# EAGLE board OOBD - BTM182 - V4 - EuroPCB (EAGLE 5.11), part 1 of 3
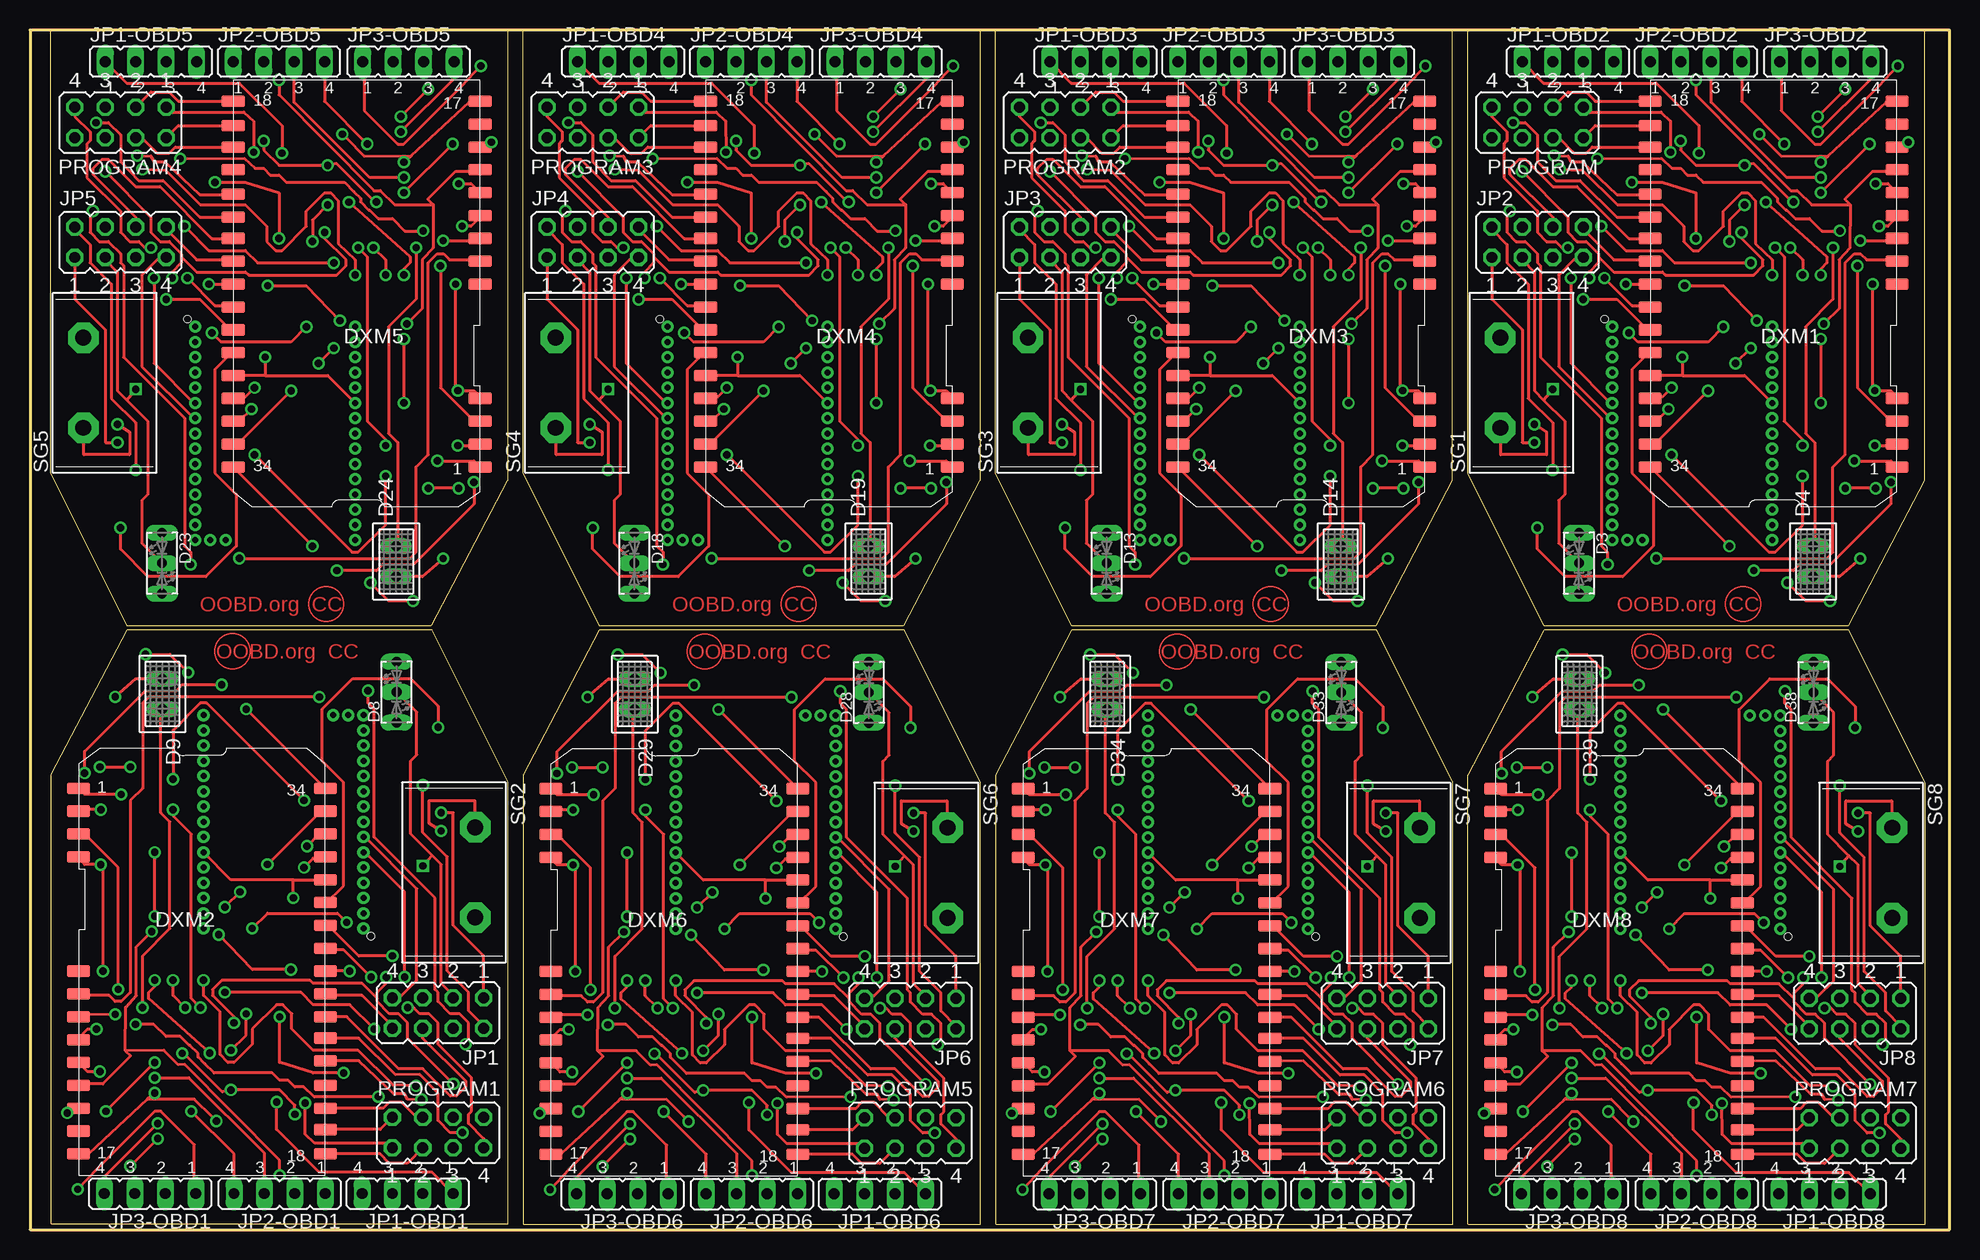
[diagram p0: board, top side]
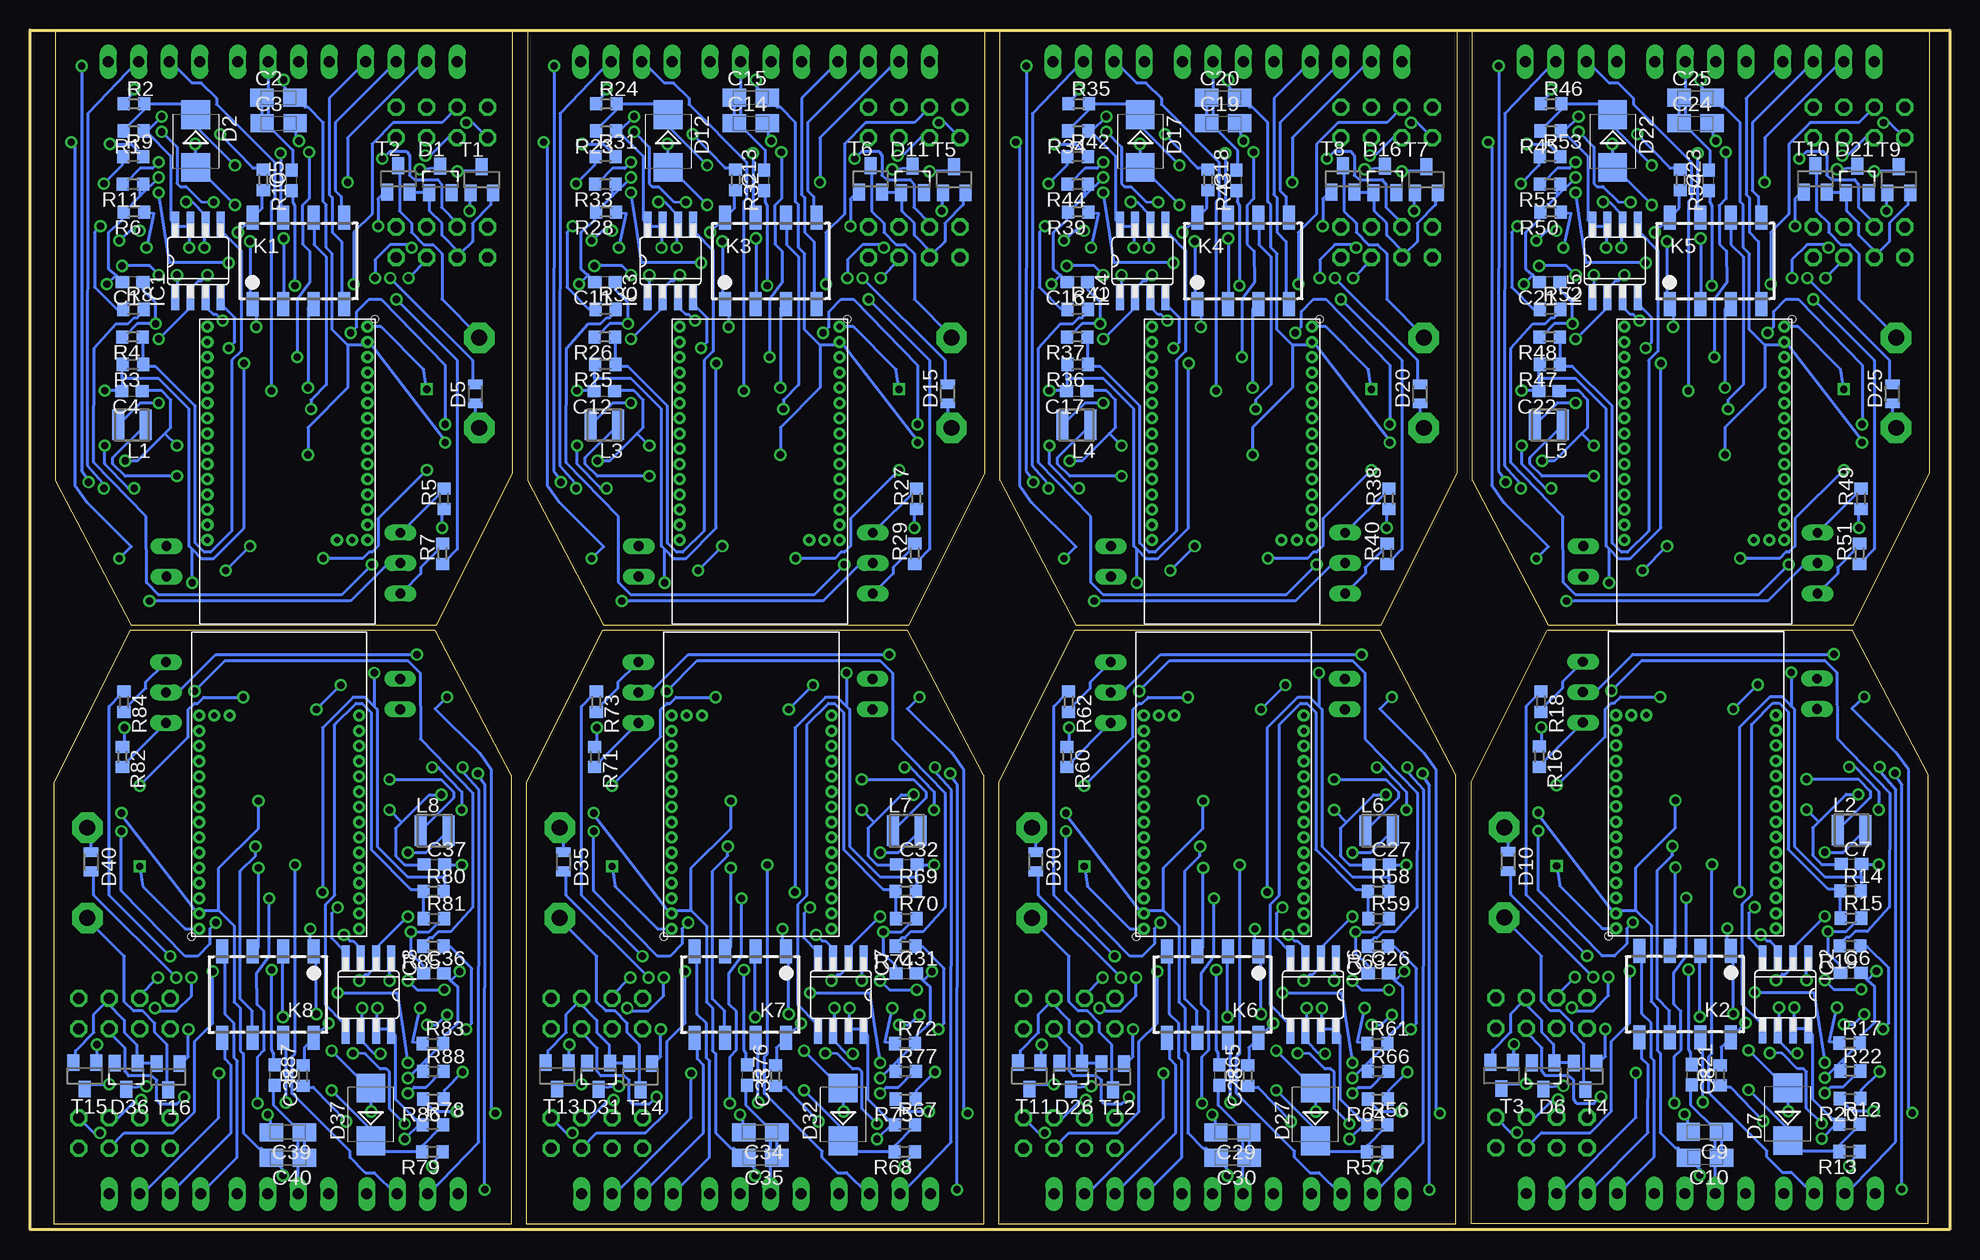
[diagram p1: board, bottom side, seen from below]

Size 160 x 100 mm. Coordinates in mm from the lower left corner, seen from the top.
Outline: 157.9,99.89 119.81,99.89 119.81,63.05 126.16,50.36
Outline: 157.91,99.89 157.91,62.43
Outline: 157.9,62.43 151.56,50.36 126.17,50.36
Outline: 1.77,0.46 39.86,0.46 39.86,37.3 33.51,49.99
Outline: 1.76,0.47 1.76,37.92
Outline: 1.77,37.92 8.11,49.99 33.5,49.99
Outline: 118.53,99.89 80.44,99.89 80.44,63.05 86.79,50.36
Outline: 118.54,99.89 118.54,62.43
Outline: 118.53,62.43 112.19,50.36 86.8,50.36
Outline: 79.16,99.89 41.07,99.89 41.07,63.05 47.42,50.36
Outline: 79.17,99.89 79.17,62.43
Outline: 79.16,62.43 72.82,50.36 47.43,50.36
Outline: 39.79,99.89 1.7,99.89 1.7,63.05 8.05,50.36
Outline: 39.8,99.89 39.8,62.43
Outline: 39.79,62.43 33.45,50.36 8.06,50.36
Outline: 41.14,0.43 79.23,0.43 79.23,37.27 72.88,49.96
Outline: 41.13,0.44 41.13,37.89
Outline: 41.14,37.89 47.48,49.96 72.87,49.96
Outline: 80.51,0.43 118.6,0.43 118.6,37.27 112.25,49.96
Outline: 80.5,0.44 80.5,37.89
Outline: 80.51,37.89 86.85,49.96 112.24,49.96
Outline: 119.88,0.43 157.97,0.43 157.97,37.27 151.62,49.96
Outline: 119.87,0.44 119.87,37.89
Outline: 119.88,37.89 126.22,49.96 151.61,49.96
Outline: 0,100 0,0 160,0 160,100 0,100
Copper layers (1*16): Top 0.035mm / dielectric 1.5mm / Bottom 0.035mm
Design rules "default *": minimum track width 10mil, minimum drill 24mil, track to track 8mil, track to pad 8mil, pad to pad 8mil, via to via 8mil, smd to smd 8mil, copper to edge 40mil, drill to drill 8mil, minimum pad ring 10mil, minimum via ring 8mil, stop-mask expansion 4mil, vias tented up to drill 0mil, thermal gap 10mil
tRestrict: area 132,50.6 to 144.3,53.9; area 15.3,46.4 to 27.7,49.7; area 92.6,50.6 to 105,53.9; area 53.3,50.6 to 65.6,53.9; area 13.9,50.6 to 26.2,53.9; area 54.7,46.4 to 67,49.7; area 94.1,46.4 to 106.4,49.7; area 133.5,46.4 to 145.8,49.7

## Footprints (pad centres in the part's own frame; a part is rotated, then mirrored left to right if it is on the bottom)
BTM182 = drill 0.5 pad 0.813 round: P$1 6.985,-13.97; P$2 8.255,-13.97; P$3 9.525,-13.97; P$4 10.795,-13.97; P$5 12.065,-13.97; P$6 13.335,-13.97; P$7 14.605,-13.97; P$8 15.875,-13.97; P$9 17.145,-13.97; P$10 18.415,-13.97; P$11 19.685,-13.97; P$12 20.955,-13.97; P$13 22.225,-13.97; P$14 23.495,-13.97; P$15 24.765,-13.97; P$16 24.765,-0.635; P$17 23.495,-0.635; P$18 22.225,-0.635; P$19 20.955,-0.635; P$20 19.685,-0.635; P$21 18.415,-0.635; P$22 17.145,-0.635; P$23 15.875,-0.635; P$24 14.605,-0.635; P$25 13.335,-0.635; P$26 12.065,-0.635; P$27 10.795,-0.635; P$28 9.525,-0.635; P$29 8.255,-0.635; P$30 6.985,-0.635; P$31 6.985,-12.7; P$32 6.985,-11.43 | hole 0.6: 25.4,-14.605
C0603 = smd 1.1 x 1: 1 -0.85,0; 2 0.85,0
A/3216-18R = smd 1.95 x 1.5: + 1.375,0; - -1.375,0
SOT23 = smd 1 x 1.4: 1 -0.95,-1.1; 2 0.95,-1.1; 3 0,1.1
SMB = smd 2.4 x 2.4: A 2.2,0; C -2.2,0
DUOLED2X5 = drill 0.813 long: AG -2.54,0; AR 2.54,0; K 0,0
U57X32 = drill 0.813 long: A -1.27,0; K 1.27,0
MICROMELF-R = smd 0.8 x 1.2: A 0.8,0; C -0.8,0
DMX1-MINI = smd 1.93 x 0.965: 1 0,32.258; 2 0,30.353; 3 0,28.448; 4 0,26.543; 9 0,17.018; 10 0,15.113; 11 0,13.208; 12 0,11.303; 13 0,9.398; 14 0,7.493; 15 0,5.588; 16 0,3.683; 17 0,1.778; 18 20.574,1.778; 19 20.574,3.81; 20 20.574,5.588; 21 20.574,7.493; 22 20.574,9.525; 23 20.574,11.43; 24 20.574,13.208; 25 20.574,15.113; 26 20.574,17.018; 27 20.574,18.923; 28 20.574,20.828; 29 20.574,22.733; 30 20.574,24.638; 31 20.574,26.543; 32 20.574,28.448; 33 20.574,30.353; 34 20.574,32.258
SO8 = smd 0.66 x 2.032: 1 -1.905,-3.073; 2 -0.635,-3.073; 3 0.635,-3.073; 4 1.905,-3.073; 5 1.905,3.073; 6 0.635,3.073; 7 -0.635,3.073; 8 -1.905,3.073
JP4Q = drill 0.914 octagon: 1 -3.81,-1.27; 2 -3.81,1.27; 3 -1.27,-1.27; 4 -1.27,1.27; 5 1.27,-1.27; 6 1.27,1.27; 7 3.81,-1.27; 8 3.81,1.27
JP4 = drill 0.914 long: 1 -3.81,0; 2 -1.27,0; 3 1.27,0; 4 3.81,0
G6K-2F = smd 1 x 2: 1 -3.81,-3.6; 2 -1.27,-3.6; 3 1.27,-3.6; 4 3.81,-3.6; 5 3.81,3.6; 6 1.27,3.6; 7 -1.27,3.6; 8 -3.81,3.6
SM-NE29 = smd 1 x 2.54: 1 -1.15,0; 2 1.15,0
R0603 = smd 1 x 1.1: 1 -0.85,0; 2 0.85,0
B/C11S = drill 1.321 pad 2.54 octagon: 1 -3.759,0; 2 3.759,0

## Placement (x,y rotation side)
BTM1  BT  [BTM182]  13.82,49.86 270 bottom
BTM2  BT  [BTM182]  106.47,50.49 90 bottom
BTM3  BT  [BTM182]  67.11,50.49 90 bottom
BTM4  BT  [BTM182]  27.73,50.49 90 bottom
BTM5  BT  [BTM182]  53.2,49.83 270 bottom
BTM6  BT  [BTM182]  92.56,49.83 270 bottom
BTM7  BT  [BTM182]  131.94,49.83 270 bottom
BTM182  BT  [BTM182]  145.84,50.49 90 bottom
C1  1µF  [C0603]  151.44,78.98 180 bottom
C2  220µF/6V  [A/3216-18R]  139.29,94.36 0 bottom
C3  47µF/35V  [A/3216-18R]  139.27,92.22 0 bottom
C4  100nF  [C0603]  151.49,69.89 180 bottom
C5  470pF  [C0603]  138.19,87.45 90 bottom
C6  1µF  [C0603]  8.23,21.38 0 bottom
C7  100nF  [C0603]  8.18,30.47 0 bottom
C8  470pF  [C0603]  21.48,12.9 270 bottom
C9  47µF/35V  [A/3216-18R]  20.4,8.14 180 bottom
C10  220µF/6V  [A/3216-18R]  20.38,6 180 bottom
C11  1µF  [C0603]  112.07,78.98 180 bottom
C12  100nF  [C0603]  112.12,69.89 180 bottom
C13  470pF  [C0603]  98.82,87.45 90 bottom
C14  47µF/35V  [A/3216-18R]  99.9,92.22 0 bottom
C15  220µF/6V  [A/3216-18R]  99.92,94.36 0 bottom
C16  1µF  [C0603]  72.7,78.98 180 bottom
C17  100nF  [C0603]  72.75,69.89 180 bottom
C18  470pF  [C0603]  59.45,87.45 90 bottom
C19  47µF/35V  [A/3216-18R]  60.53,92.22 0 bottom
C20  220µF/6V  [A/3216-18R]  60.55,94.36 0 bottom
C21  1µF  [C0603]  33.33,78.98 180 bottom
C22  100nF  [C0603]  33.38,69.89 180 bottom
C23  470pF  [C0603]  20.08,87.45 90 bottom
C24  47µF/35V  [A/3216-18R]  21.16,92.22 0 bottom
C25  220µF/6V  [A/3216-18R]  21.18,94.36 0 bottom
C26  1µF  [C0603]  47.6,21.35 0 bottom
C27  100nF  [C0603]  47.55,30.44 0 bottom
C28  470pF  [C0603]  60.85,12.87 270 bottom
C29  47µF/35V  [A/3216-18R]  59.77,8.11 180 bottom
C30  220µF/6V  [A/3216-18R]  59.75,5.97 180 bottom
C31  1µF  [C0603]  86.97,21.35 0 bottom
C32  100nF  [C0603]  86.92,30.44 0 bottom
C33  470pF  [C0603]  100.22,12.87 270 bottom
C34  47µF/35V  [A/3216-18R]  99.14,8.11 180 bottom
C35  220µF/6V  [A/3216-18R]  99.12,5.97 180 bottom
C36  1µF  [C0603]  126.34,21.35 0 bottom
C37  100nF  [C0603]  126.29,30.44 0 bottom
C38  470pF  [C0603]  139.59,12.87 270 bottom
C39  47µF/35V  [A/3216-18R]  138.51,8.11 180 bottom
C40  220µF/6V  [A/3216-18R]  138.49,5.97 180 bottom
D1  BAS40  [SOT23]  125.8,87.55 0 bottom
D2  B140  [SMB]  146.19,90.74 270 bottom
D3  HS / MS-CAN  [DUOLED2X5]  129.12,55.55 270 top
D4  U57X32  [U57X32]  148.63,55.7 90 top
D5  1N4148DO35-7  [MICROMELF-R]  122.86,69.67 90 bottom
D6  BAS40  [SOT23]  33.87,12.81 180 bottom
D7  B140  [SMB]  13.48,9.62 90 bottom
D8  HS / MS-CAN  [DUOLED2X5]  30.55,44.8 90 top
D9  U57X32  [U57X32]  11.04,44.66 270 top
D10  1N4148DO35-7  [MICROMELF-R]  36.81,30.69 270 bottom
D11  BAS40  [SOT23]  86.43,87.55 0 bottom
D12  B140  [SMB]  106.82,90.74 270 bottom
D13  HS / MS-CAN  [DUOLED2X5]  89.75,55.55 270 top
D14  U57X32  [U57X32]  109.26,55.7 90 top
D15  1N4148DO35-7  [MICROMELF-R]  83.49,69.67 90 bottom
D16  BAS40  [SOT23]  47.06,87.55 0 bottom
D17  B140  [SMB]  67.45,90.74 270 bottom
D18  HS / MS-CAN  [DUOLED2X5]  50.38,55.55 270 top
D19  U57X32  [U57X32]  69.89,55.7 90 top
D20  1N4148DO35-7  [MICROMELF-R]  44.12,69.67 90 bottom
D21  BAS40  [SOT23]  7.69,87.55 0 bottom
D22  B140  [SMB]  28.08,90.74 270 bottom
D23  HS / MS-CAN  [DUOLED2X5]  11.01,55.55 270 top
D24  U57X32  [U57X32]  30.52,55.7 90 top
D25  1N4148DO35-7  [MICROMELF-R]  4.75,69.67 90 bottom
D26  BAS40  [SOT23]  73.24,12.78 180 bottom
D27  B140  [SMB]  52.85,9.59 90 bottom
D28  HS / MS-CAN  [DUOLED2X5]  69.92,44.77 90 top
D29  U57X32  [U57X32]  50.41,44.63 270 top
D30  1N4148DO35-7  [MICROMELF-R]  76.18,30.66 270 bottom
D31  BAS40  [SOT23]  112.61,12.78 180 bottom
D32  B140  [SMB]  92.22,9.59 90 bottom
D33  HS / MS-CAN  [DUOLED2X5]  109.29,44.77 90 top
D34  U57X32  [U57X32]  89.78,44.63 270 top
D35  1N4148DO35-7  [MICROMELF-R]  115.55,30.66 270 bottom
D36  BAS40  [SOT23]  151.98,12.78 180 bottom
D37  B140  [SMB]  131.59,9.59 90 bottom
D38  HS / MS-CAN  [DUOLED2X5]  148.66,44.77 90 top
D39  U57X32  [U57X32]  129.15,44.63 270 top
D40  1N4148DO35-7  [MICROMELF-R]  154.92,30.66 270 bottom
DXM1  Controller  [DMX1-MINI]  155.62,95.83 180 top
DXM2  Controller  [DMX1-MINI]  4.05,4.52 0 top
DXM3  Controller  [DMX1-MINI]  116.25,95.83 180 top
DXM4  Controller  [DMX1-MINI]  76.88,95.83 180 top
DXM5  Controller  [DMX1-MINI]  37.51,95.83 180 top
DXM6  Controller  [DMX1-MINI]  43.42,4.49 0 top
DXM7  Controller  [DMX1-MINI]  82.79,4.49 0 top
DXM8  Controller  [DMX1-MINI]  122.16,4.49 0 top
IC1  MC34063-SO  [SO8]  145.99,80.75 0 bottom
IC2  MC34063-SO  [SO8]  13.68,19.61 180 bottom
IC3  MC34063-SO  [SO8]  106.62,80.75 0 bottom
IC4  MC34063-SO  [SO8]  67.25,80.75 0 bottom
IC5  MC34063-SO  [SO8]  27.88,80.75 0 bottom
IC6  MC34063-SO  [SO8]  53.05,19.58 180 bottom
IC7  MC34063-SO  [SO8]  92.42,19.58 180 bottom
IC8  MC34063-SO  [SO8]  131.79,19.58 180 bottom
JP1  _  [JP4Q]  34.02,18.04 180 top
JP1-OBD1  1  [JP4]  31.48,3 180 top
JP1-OBD2  1  [JP4]  128.19,97.36 0 top
JP1-OBD3  1  [JP4]  88.82,97.36 0 top
JP1-OBD4  1  [JP4]  49.45,97.36 0 top
JP1-OBD5  1  [JP4]  10.08,97.36 0 top
JP1-OBD6  1  [JP4]  70.85,2.97 180 top
JP1-OBD7  1  [JP4]  110.22,2.97 180 top
JP1-OBD8  1  [JP4]  149.59,2.97 180 top
JP2  _  [JP4Q]  125.65,82.31 0 top
JP2-OBD1  2  [JP4]  20.81,3 180 top
JP2-OBD2  2  [JP4]  138.86,97.36 0 top
JP2-OBD3  2  [JP4]  99.49,97.36 0 top
JP2-OBD4  2  [JP4]  60.12,97.36 0 top
JP2-OBD5  2  [JP4]  20.75,97.36 0 top
JP2-OBD6  2  [JP4]  60.18,2.97 180 top
JP2-OBD7  2  [JP4]  99.55,2.97 180 top
JP2-OBD8  2  [JP4]  138.92,2.97 180 top
JP3  _  [JP4Q]  86.28,82.31 0 top
JP3-OBD1  3  [JP4]  10.02,3 180 top
JP3-OBD2  3  [JP4]  149.66,97.36 0 top
JP3-OBD3  3  [JP4]  110.28,97.36 0 top
JP3-OBD4  3  [JP4]  70.92,97.36 0 top
JP3-OBD5  3  [JP4]  31.55,97.36 0 top
JP3-OBD6  3  [JP4]  49.38,2.97 180 top
JP3-OBD7  3  [JP4]  88.75,2.97 180 top
JP3-OBD8  3  [JP4]  128.12,2.97 180 top
JP4  _  [JP4Q]  46.91,82.31 0 top
JP5  _  [JP4Q]  7.54,82.31 0 top
JP6  _  [JP4Q]  73.39,18.01 180 top
JP7  _  [JP4Q]  112.76,18.01 180 top
JP8  _  [JP4Q]  152.13,18.01 180 top
K1  G6K-2F  [G6K-2F]  137.62,80.74 0 bottom
K2  G6K-2F  [G6K-2F]  22.05,19.61 180 bottom
K3  G6K-2F  [G6K-2F]  98.25,80.74 0 bottom
K4  G6K-2F  [G6K-2F]  58.88,80.74 0 bottom
K5  G6K-2F  [G6K-2F]  19.51,80.74 0 bottom
K6  G6K-2F  [G6K-2F]  61.42,19.58 180 bottom
K7  G6K-2F  [G6K-2F]  100.79,19.58 180 bottom
K8  G6K-2F  [G6K-2F]  140.16,19.58 180 bottom
L1  220µH  [SM-NE29]  151.51,67.07 180 bottom
L2  220µH  [SM-NE29]  8.16,33.29 0 bottom
L3  220µH  [SM-NE29]  112.14,67.07 180 bottom
L4  220µH  [SM-NE29]  72.77,67.07 180 bottom
L5  220µH  [SM-NE29]  33.4,67.07 180 bottom
L6  220µH  [SM-NE29]  47.53,33.26 0 bottom
L7  220µH  [SM-NE29]  86.9,33.26 0 bottom
L8  220µH  [SM-NE29]  126.27,33.26 0 bottom
PROGRAM  [JP4Q]  125.65,92.28 180 top
PROGRAM1  [JP4Q]  34.02,8.08 0 top
PROGRAM2  [JP4Q]  86.28,92.28 180 top
PROGRAM3  [JP4Q]  46.91,92.28 180 top
PROGRAM4  [JP4Q]  7.54,92.28 180 top
PROGRAM5  [JP4Q]  73.39,8.05 0 top
PROGRAM6  [JP4Q]  112.76,8.05 0 top
PROGRAM7  [JP4Q]  152.13,8.05 0 top
R1  1R  [R0603]  151.35,91.59 180 bottom
R2  1R  [R0603]  151.32,93.85 0 bottom
R3  1K  [R0603]  151.42,72.13 180 bottom
R4  1K6  [R0603]  151.45,74.4 180 bottom
R5  100R  [R0603]  125.48,60.93 90 bottom
R6  120R  [R0603]  151.35,84.82 180 bottom
R7  100R  [R0603]  125.61,56.34 90 bottom
R8  4K7  [R0603]  151.39,76.71 0 bottom
R9  4K7  [R0603]  151.39,89.44 0 bottom
R10  180k  [R0603]  140.55,87.5 270 bottom
R11  47k  [R0603]  151.4,87.15 180 bottom
R12  1R  [R0603]  8.32,8.77 0 bottom
R13  1R  [R0603]  8.35,6.51 180 bottom
R14  1K  [R0603]  8.25,28.23 0 bottom
R15  1K6  [R0603]  8.22,25.95 0 bottom
R16  100R  [R0603]  34.19,39.42 270 bottom
R17  120R  [R0603]  8.32,15.54 0 bottom
R18  100R  [R0603]  34.06,44.02 270 bottom
R19  4K7  [R0603]  8.28,23.65 180 bottom
R20  4K7  [R0603]  8.28,10.91 180 bottom
R21  180k  [R0603]  19.12,12.85 90 bottom
R22  47k  [R0603]  8.27,13.21 0 bottom
R23  1R  [R0603]  111.98,91.59 180 bottom
R24  1R  [R0603]  111.95,93.85 0 bottom
R25  1K  [R0603]  112.05,72.13 180 bottom
R26  1K6  [R0603]  112.08,74.4 180 bottom
R27  100R  [R0603]  86.11,60.93 90 bottom
R28  120R  [R0603]  111.98,84.82 180 bottom
R29  100R  [R0603]  86.24,56.34 90 bottom
R30  4K7  [R0603]  112.02,76.71 0 bottom
R31  4K7  [R0603]  112.02,89.44 0 bottom
R32  180k  [R0603]  101.18,87.5 270 bottom
R33  47k  [R0603]  112.03,87.15 180 bottom
R34  1R  [R0603]  72.61,91.59 180 bottom
R35  1R  [R0603]  72.58,93.85 0 bottom
R36  1K  [R0603]  72.68,72.13 180 bottom
R37  1K6  [R0603]  72.71,74.4 180 bottom
R38  100R  [R0603]  46.74,60.93 90 bottom
R39  120R  [R0603]  72.61,84.82 180 bottom
R40  100R  [R0603]  46.87,56.34 90 bottom
R41  4K7  [R0603]  72.65,76.71 0 bottom
R42  4K7  [R0603]  72.65,89.44 0 bottom
R43  180k  [R0603]  61.81,87.5 270 bottom
R44  47k  [R0603]  72.66,87.15 180 bottom
R45  1R  [R0603]  33.24,91.59 180 bottom
R46  1R  [R0603]  33.21,93.85 0 bottom
R47  1K  [R0603]  33.31,72.13 180 bottom
R48  1K6  [R0603]  33.34,74.4 180 bottom
R49  100R  [R0603]  7.37,60.93 90 bottom
R50  120R  [R0603]  33.24,84.82 180 bottom
R51  100R  [R0603]  7.5,56.34 90 bottom
R52  4K7  [R0603]  33.28,76.71 0 bottom
R53  4K7  [R0603]  33.28,89.44 0 bottom
R54  180k  [R0603]  22.44,87.5 270 bottom
R55  47k  [R0603]  33.29,87.15 180 bottom
R56  1R  [R0603]  47.69,8.74 0 bottom
R57  1R  [R0603]  47.72,6.48 180 bottom
R58  1K  [R0603]  47.62,28.2 0 bottom
R59  1K6  [R0603]  47.59,25.92 0 bottom
R60  100R  [R0603]  73.56,39.39 270 bottom
R61  120R  [R0603]  47.69,15.51 0 bottom
R62  100R  [R0603]  73.43,43.99 270 bottom
R63  4K7  [R0603]  47.65,23.62 180 bottom
R64  4K7  [R0603]  47.65,10.88 180 bottom
R65  180k  [R0603]  58.49,12.82 90 bottom
R66  47k  [R0603]  47.64,13.18 0 bottom
R67  1R  [R0603]  87.06,8.74 0 bottom
R68  1R  [R0603]  87.09,6.48 180 bottom
R69  1K  [R0603]  86.99,28.2 0 bottom
R70  1K6  [R0603]  86.96,25.92 0 bottom
R71  100R  [R0603]  112.93,39.39 270 bottom
R72  120R  [R0603]  87.06,15.51 0 bottom
R73  100R  [R0603]  112.8,43.99 270 bottom
R74  4K7  [R0603]  87.02,23.62 180 bottom
R75  4K7  [R0603]  87.02,10.88 180 bottom
R76  180k  [R0603]  97.86,12.82 90 bottom
R77  47k  [R0603]  87.01,13.18 0 bottom
R78  1R  [R0603]  126.43,8.74 0 bottom
R79  1R  [R0603]  126.46,6.48 180 bottom
R80  1K  [R0603]  126.36,28.2 0 bottom
R81  1K6  [R0603]  126.33,25.92 0 bottom
R82  100R  [R0603]  152.3,39.39 270 bottom
R83  120R  [R0603]  126.43,15.51 0 bottom
R84  100R  [R0603]  152.17,43.99 270 bottom
R85  4K7  [R0603]  126.39,23.62 180 bottom
R86  4K7  [R0603]  126.39,10.88 180 bottom
R87  180k  [R0603]  137.23,12.82 90 bottom
R88  47k  [R0603]  126.38,13.18 0 bottom
SG1  B/C11S  [B/C11S]  122.56,70.59 90 top
SG2  B/C11S  [B/C11S]  37.11,29.77 270 top
SG3  B/C11S  [B/C11S]  83.19,70.59 90 top
SG4  B/C11S  [B/C11S]  43.82,70.59 90 top
SG5  B/C11S  [B/C11S]  4.45,70.59 90 top
SG6  B/C11S  [B/C11S]  76.48,29.74 270 top
SG7  B/C11S  [B/C11S]  115.85,29.74 270 top
SG8  B/C11S  [B/C11S]  155.22,29.74 270 top
T1  BC847  [SOT23]  122.34,87.51 0 bottom
T2  BC847  [SOT23]  129.3,87.59 0 bottom
T3  BC847  [SOT23]  37.33,12.84 180 bottom
T4  BC847  [SOT23]  30.37,12.77 180 bottom
T5  BC847  [SOT23]  82.97,87.51 0 bottom
T6  BC847  [SOT23]  89.93,87.59 0 bottom
T7  BC847  [SOT23]  43.6,87.51 0 bottom
T8  BC847  [SOT23]  50.56,87.59 0 bottom
T9  BC847  [SOT23]  4.23,87.51 0 bottom
T10  BC847  [SOT23]  11.19,87.59 0 bottom
T11  BC847  [SOT23]  76.7,12.81 180 bottom
T12  BC847  [SOT23]  69.74,12.74 180 bottom
T13  BC847  [SOT23]  116.07,12.81 180 bottom
T14  BC847  [SOT23]  109.11,12.74 180 bottom
T15  BC847  [SOT23]  155.44,12.81 180 bottom
T16  BC847  [SOT23]  148.48,12.74 180 bottom

## Library data of the parts
BTM1-BTM7 BTM182 = BTM182
C1-C40 R1-R88 = rcl
D1 D2 D5-D7 D10-D12 D15-D17 D20-D22 D25-D27 D30-D32 D35-D37 D40 = diode
D3 D4 D8 D9 D13 D14 D18 D19 D23 D24 D28 D29 D33 D34 D38 D39 = led
DXM1-DXM8 = DXM
IC1-IC8 = mc34063
JP1 JP1-OBD1-JP1-OBD8 JP2 JP2-OBD1-JP2-OBD8 JP3 JP3-OBD1-JP3-OBD8 JP4-JP8 PROGRAM PROGRAM1-PROGRAM7 = jumper
K1-K8 = relay; MF: OMRON COMPONENTS USA; MPN: G6K-2F DC24; OC_FARNELL: 1690427; OC_NEWARK: 36K7467
L1-L8 = inductor-neosid; OC_FARNELL: unknown; OC_NEWARK: unknown
SG1-SG8 = buzzer; OC_FARNELL: unknown; OC_NEWARK: unknown
T1-T16 = transistor

## Nets
3V3OUT: DXM1.9
3V3OUT1: DXM2.9
3V3OUT2: DXM3.9
3V3OUT3: DXM4.9
3V3OUT4: DXM5.9
3V3OUT5: DXM6.9
3V3OUT6: DXM7.9
3V3OUT7: DXM8.9
+3V1: BTM1.P$14 C6.1 C10.+ DXM2.14 JP1.1 L2.1 R15.2
+3V2: BTM2.P$14 C11.1 C15.+ DXM3.14 JP3.1 L3.1 R26.2
+3V3: BTM182.P$14 C1.1 C2.+ DXM1.14 JP2.1 L1.1 R4.2
+3V4: BTM3.P$14 C16.1 C20.+ DXM4.14 JP4.1 L4.1 R37.2
+3V5: BTM4.P$14 C21.1 C25.+ DXM5.14 JP5.1 L5.1 R48.2
+3V6: BTM5.P$14 C26.1 C30.+ DXM6.14 JP6.1 L6.1 R59.2
+3V7: BTM6.P$14 C31.1 C35.+ DXM7.14 JP7.1 L7.1 R70.2
+3V8: BTM7.P$14 C36.1 C40.+ DXM8.14 JP8.1 L8.1 R81.2
+12V: D2.A D5.C JP2-OBD2.4 K1.1 SG1.1
+12V1: D7.A D10.C JP2-OBD1.4 K2.1 SG2.1
+12V2: D12.A D15.C JP2-OBD3.4 K3.1 SG3.1
+12V3: D17.A D20.C JP2-OBD4.4 K4.1 SG4.1
+12V4: D22.A D25.C JP2-OBD5.4 K5.1 SG5.1
+12V5: D27.A D30.C JP2-OBD6.4 K6.1 SG6.1
+12V6: D32.A D35.C JP2-OBD7.4 K7.1 SG7.1
+12V7: D37.A D40.C JP2-OBD8.4 K8.1 SG8.1
A0: DXM1.18 PROGRAM.3
A1: DXM2.18 PROGRAM1.3
A2: DXM3.18 PROGRAM2.3
A3: DXM4.18 PROGRAM3.3
A4: DXM5.18 PROGRAM4.3
A5: DXM6.18 PROGRAM5.3
A6: DXM7.18 PROGRAM6.3
A7: DXM8.18 PROGRAM7.3
CS: DXM1.19 PROGRAM.2
CS1: DXM2.19 PROGRAM1.2
CS2: DXM3.19 PROGRAM2.2
CS3: DXM4.19 PROGRAM3.2
CS4: DXM5.19 PROGRAM4.2
CS5: DXM6.19 PROGRAM5.2
CS6: DXM7.19 PROGRAM6.2
CS7: DXM8.19 PROGRAM7.2
CTS: DXM1.26 PROGRAM.5
CTS1: DXM2.26 PROGRAM1.5
CTS2: DXM3.26 PROGRAM2.5
CTS3: DXM4.26 PROGRAM3.5
CTS4: DXM5.26 PROGRAM4.5
CTS5: DXM6.26 PROGRAM5.5
CTS6: DXM7.26 PROGRAM6.5
CTS7: DXM8.26 PROGRAM7.5
GND: BTM182.P$15 C1.2 C2.- C3.- C4.2 C5.2 D1.1 D3.K DXM1.4 IC1.4 JP2-OBD2.3 JP2.3 R3.2 R6.2 R11.1 T1.2 T2.2
GND1: BTM1.P$15 C6.2 C7.2 C8.2 C9.- C10.- D6.1 D8.K DXM2.4 IC2.4 JP1.3 JP2-OBD1.3 R14.2 R17.2 R22.1 T3.2 T4.2
GND2: BTM2.P$15 C11.2 C12.2 C13.2 C14.- C15.- D11.1 D13.K DXM3.4 IC3.4 JP2-OBD3.3 JP3.3 R25.2 R28.2 R33.1 T5.2 T6.2
GND3: BTM3.P$15 C16.2 C17.2 C18.2 C19.- C20.- D16.1 D18.K DXM4.4 IC4.4 JP2-OBD4.3 JP4.3 R36.2 R39.2 R44.1 T7.2 T8.2
GND4: BTM4.P$15 C21.2 C22.2 C23.2 C24.- C25.- D21.1 D23.K DXM5.4 IC5.4 JP2-OBD5.3 JP5.3 R47.2 R50.2 R55.1 T9.2 T10.2
GND5: BTM5.P$15 C26.2 C27.2 C28.2 C29.- C30.- D26.1 D28.K DXM6.4 IC6.4 JP2-OBD6.3 JP6.3 R58.2 R61.2 R66.1 T11.2 T12.2
GND6: BTM6.P$15 C31.2 C32.2 C33.2 C34.- C35.- D31.1 D33.K DXM7.4 IC7.4 JP2-OBD7.3 JP7.3 R69.2 R72.2 R77.1 T13.2 T14.2
GND7: BTM7.P$15 C36.2 C37.2 C38.2 C39.- C40.- D36.1 D38.K DXM8.4 IC8.4 JP2-OBD8.3 JP8.3 R80.2 R83.2 R88.1 T15.2 T16.2
HS_CAN-H: JP1-OBD2.3 K1.5
HS_CAN-H1: JP1-OBD1.3 K2.5
HS_CAN-H2: JP1-OBD3.3 K3.5
HS_CAN-H3: JP1-OBD4.3 K4.5
HS_CAN-H4: JP1-OBD5.3 K5.5
HS_CAN-H5: JP1-OBD6.3 K6.5
HS_CAN-H6: JP1-OBD7.3 K7.5
HS_CAN-H7: JP1-OBD8.3 K8.5
HS_CAN-L: JP1-OBD2.4 K1.4
HS_CAN-L1: JP1-OBD1.4 K2.4
HS_CAN-L2: JP1-OBD3.4 K3.4
HS_CAN-L3: JP1-OBD4.4 K4.4
HS_CAN-L4: JP1-OBD5.4 K5.4
HS_CAN-L5: JP1-OBD6.4 K6.4
HS_CAN-L6: JP1-OBD7.4 K7.4
HS_CAN-L7: JP1-OBD8.4 K8.4
K-LINE: DXM1.33 JP3-OBD2.2
K-LINE1: DXM2.33 JP3-OBD1.2
K-LINE2: DXM3.33 JP3-OBD3.2
K-LINE3: DXM4.33 JP3-OBD4.2
K-LINE4: DXM5.33 JP3-OBD5.2
K-LINE5: DXM6.33 JP3-OBD6.2
K-LINE6: DXM7.33 JP3-OBD7.2
K-LINE7: DXM8.33 JP3-OBD8.2
L-LINE: DXM1.34 JP3-OBD2.1
L-LINE1: DXM2.34 JP3-OBD1.1
L-LINE2: DXM3.34 JP3-OBD3.1
L-LINE3: DXM4.34 JP3-OBD4.1
L-LINE4: DXM5.34 JP3-OBD5.1
L-LINE5: DXM6.34 JP3-OBD6.1
L-LINE6: DXM7.34 JP3-OBD7.1
L-LINE7: DXM8.34 JP3-OBD8.1
MISO: DXM1.22 PROGRAM.6
MISO1: DXM2.22 PROGRAM1.6
MISO2: DXM3.22 PROGRAM2.6
MISO3: DXM4.22 PROGRAM3.6
MISO4: DXM5.22 PROGRAM4.6
MISO5: DXM6.22 PROGRAM5.6
MISO6: DXM7.22 PROGRAM6.6
MISO7: DXM8.22 PROGRAM7.6
MOSI: DXM1.23 PROGRAM.8
MOSI1: DXM2.23 PROGRAM1.8
MOSI2: DXM3.23 PROGRAM2.8
MOSI3: DXM4.23 PROGRAM3.8
MOSI4: DXM5.23 PROGRAM4.8
MOSI5: DXM6.23 PROGRAM5.8
MOSI6: DXM7.23 PROGRAM6.8
MOSI7: DXM8.23 PROGRAM7.8
MS_CAN-H: JP1-OBD2.1 K1.7
MS_CAN-H1: JP1-OBD1.1 K2.7
MS_CAN-H2: JP1-OBD3.1 K3.7
MS_CAN-H3: JP1-OBD4.1 K4.7
MS_CAN-H4: JP1-OBD5.1 K5.7
MS_CAN-H5: JP1-OBD6.1 K6.7
MS_CAN-H6: JP1-OBD7.1 K7.7
MS_CAN-H7: JP1-OBD8.1 K8.7
MS_CAN-L: JP1-OBD2.2 K1.2
MS_CAN-L1: JP1-OBD1.2 K2.2
MS_CAN-L2: JP1-OBD3.2 K3.2
MS_CAN-L3: JP1-OBD4.2 K4.2
MS_CAN-L4: JP1-OBD5.2 K5.2
MS_CAN-L5: JP1-OBD6.2 K6.2
MS_CAN-L6: JP1-OBD7.2 K7.2
MS_CAN-L7: JP1-OBD8.2 K8.2
N$1: IC1.5 R3.1 R4.1
N$2: C5.1 IC1.3
N$3: D1.3 IC1.2 L1.2
N$4: D3.AR R7.2
N$5: IC1.1 IC1.7 IC1.8 R1.1 R2.1
N$6: D3.AG R5.2
N$7: D4.K R6.1
N$8: D4.A DXM1.15
N$9: DXM1.29 R5.1
N$10: DXM1.25 JP2.8
N$11: C3.+ C4.1 D2.C DXM1.1 IC1.6 R1.2 R2.2
N$12: DXM1.24 JP2.6
N$13: BTM182.P$10 JP2.5
N$14: BTM182.P$9 JP2.7
N$15: DXM1.28 R7.1
N$16: DXM1.10 JP2.2
N$17: DXM1.11 JP2.4
N$18: C8.1 IC2.3
N$19: DXM1.17 R10.1 R11.2
N$20: R8.2 T1.1
N$21: DXM1.32 K1.6
N$22: DXM1.31 K1.3
N$23: SG1.2 T2.3
N$24: R9.2 T2.1
N$25: DXM1.12 R8.1
N$26: DXM1.13 R9.1
N$27: D5.A K1.8 R10.2 T1.3
N$28: D6.3 IC2.2 L2.2
N$29: IC2.1 IC2.7 IC2.8 R12.1 R13.1
N$30: IC2.5 R14.1 R15.1
N$31: DXM2.24 JP1.6
N$32: BTM1.P$9 JP1.7
N$33: DXM2.10 JP1.2
N$34: DXM2.11 JP1.4
N$35: BTM1.P$10 JP1.5
N$36: DXM2.25 JP1.8
N$37: C7.1 C9.+ D7.C DXM2.1 IC2.6 R12.2 R13.2
N$38: D8.AR R18.2
N$39: D8.AG R16.2
N$40: D9.K R17.1
N$41: D9.A DXM2.15
N$42: DXM2.28 R18.1
N$43: DXM2.29 R16.1
N$44: DXM2.17 R21.1 R22.2
N$45: R19.2 T3.1
N$46: DXM2.32 K2.6
N$47: DXM2.31 K2.3
N$48: SG2.2 T4.3
N$49: R20.2 T4.1
N$50: DXM2.12 R19.1
N$51: DXM2.13 R20.1
N$52: D10.A K2.8 R21.2 T3.3
N$53: C13.1 IC3.3
N$54: D11.3 IC3.2 L3.2
N$55: IC3.1 IC3.7 IC3.8 R23.1 R24.1
N$56: IC3.5 R25.1 R26.1
N$57: DXM3.24 JP3.6
N$58: BTM2.P$9 JP3.7
N$59: DXM3.10 JP3.2
N$60: DXM3.11 JP3.4
N$61: BTM2.P$10 JP3.5
N$62: DXM3.25 JP3.8
N$63: C12.1 C14.+ D12.C DXM3.1 IC3.6 R23.2 R24.2
N$64: D13.AR R29.2
N$65: D13.AG R27.2
N$66: D14.K R28.1
N$67: D14.A DXM3.15
N$68: DXM3.28 R29.1
N$69: DXM3.29 R27.1
N$70: DXM3.17 R32.1 R33.2
N$71: R30.2 T5.1
N$72: DXM3.32 K3.6
N$73: DXM3.31 K3.3
N$74: SG3.2 T6.3
N$75: R31.2 T6.1
N$76: DXM3.12 R30.1
N$77: DXM3.13 R31.1
N$78: D15.A K3.8 R32.2 T5.3
N$79: C18.1 IC4.3
N$80: D16.3 IC4.2 L4.2
N$81: IC4.1 IC4.7 IC4.8 R34.1 R35.1
N$82: IC4.5 R36.1 R37.1
N$83: DXM4.24 JP4.6
N$84: BTM3.P$9 JP4.7
N$85: DXM4.10 JP4.2
N$86: DXM4.11 JP4.4
N$87: BTM3.P$10 JP4.5
N$88: DXM4.25 JP4.8
N$89: C17.1 C19.+ D17.C DXM4.1 IC4.6 R34.2 R35.2
N$90: D18.AR R40.2
N$91: D18.AG R38.2
N$92: D19.K R39.1
N$93: D19.A DXM4.15
N$94: DXM4.28 R40.1
N$95: DXM4.29 R38.1
N$96: DXM4.17 R43.1 R44.2
N$97: R41.2 T7.1
N$98: DXM4.32 K4.6
N$99: DXM4.31 K4.3
N$100: SG4.2 T8.3
N$101: R42.2 T8.1
N$102: DXM4.12 R41.1
N$103: DXM4.13 R42.1
N$104: D20.A K4.8 R43.2 T7.3
N$105: C23.1 IC5.3
N$106: D21.3 IC5.2 L5.2
N$107: IC5.1 IC5.7 IC5.8 R45.1 R46.1
N$108: IC5.5 R47.1 R48.1
N$109: DXM5.24 JP5.6
N$110: BTM4.P$9 JP5.7
N$111: DXM5.10 JP5.2
N$112: DXM5.11 JP5.4
N$113: BTM4.P$10 JP5.5
N$114: DXM5.25 JP5.8
N$115: C22.1 C24.+ D22.C DXM5.1 IC5.6 R45.2 R46.2
N$116: D23.AR R51.2
N$117: D23.AG R49.2
N$118: D24.K R50.1
N$119: D24.A DXM5.15
N$120: DXM5.28 R51.1
N$121: DXM5.29 R49.1
N$122: DXM5.17 R54.1 R55.2
N$123: R52.2 T9.1
N$124: DXM5.32 K5.6
N$125: DXM5.31 K5.3
N$126: SG5.2 T10.3
N$127: R53.2 T10.1
N$128: DXM5.12 R52.1
N$129: DXM5.13 R53.1
N$130: D25.A K5.8 R54.2 T9.3
N$131: C28.1 IC6.3
N$132: D26.3 IC6.2 L6.2
N$133: IC6.1 IC6.7 IC6.8 R56.1 R57.1
N$134: IC6.5 R58.1 R59.1
N$135: DXM6.24 JP6.6
N$136: BTM5.P$9 JP6.7
N$137: DXM6.10 JP6.2
N$138: DXM6.11 JP6.4
N$139: BTM5.P$10 JP6.5
N$140: DXM6.25 JP6.8
N$141: C27.1 C29.+ D27.C DXM6.1 IC6.6 R56.2 R57.2
N$142: D28.AR R62.2
N$143: D28.AG R60.2
N$144: D29.K R61.1
N$145: D29.A DXM6.15
N$146: DXM6.28 R62.1
N$147: DXM6.29 R60.1
N$148: DXM6.17 R65.1 R66.2
N$149: R63.2 T11.1
N$150: DXM6.32 K6.6
N$151: DXM6.31 K6.3
N$152: SG6.2 T12.3
N$153: R64.2 T12.1
N$154: DXM6.12 R63.1
N$155: DXM6.13 R64.1
N$156: D30.A K6.8 R65.2 T11.3
N$157: C33.1 IC7.3
N$158: D31.3 IC7.2 L7.2
N$159: IC7.1 IC7.7 IC7.8 R67.1 R68.1
N$160: IC7.5 R69.1 R70.1
N$161: DXM7.24 JP7.6
N$162: BTM6.P$9 JP7.7
N$163: DXM7.10 JP7.2
N$164: DXM7.11 JP7.4
N$165: BTM6.P$10 JP7.5
N$166: DXM7.25 JP7.8
N$167: C32.1 C34.+ D32.C DXM7.1 IC7.6 R67.2 R68.2
N$168: D33.AR R73.2
N$169: D33.AG R71.2
N$170: D34.K R72.1
N$171: D34.A DXM7.15
N$172: DXM7.28 R73.1
N$173: DXM7.29 R71.1
N$174: DXM7.17 R76.1 R77.2
N$175: R74.2 T13.1
N$176: DXM7.32 K7.6
N$177: DXM7.31 K7.3
N$178: SG7.2 T14.3
N$179: R75.2 T14.1
N$180: DXM7.12 R74.1
N$181: DXM7.13 R75.1
N$182: D35.A K7.8 R76.2 T13.3
N$183: C38.1 IC8.3
N$184: D36.3 IC8.2 L8.2
N$185: IC8.1 IC8.7 IC8.8 R78.1 R79.1
N$186: IC8.5 R80.1 R81.1
N$187: DXM8.24 JP8.6
N$188: BTM7.P$9 JP8.7
N$189: DXM8.10 JP8.2
N$190: DXM8.11 JP8.4
N$191: BTM7.P$10 JP8.5
N$192: DXM8.25 JP8.8
N$193: C37.1 C39.+ D37.C DXM8.1 IC8.6 R78.2 R79.2
N$194: D38.AR R84.2
N$195: D38.AG R82.2
N$196: D39.K R83.1
N$197: D39.A DXM8.15
N$198: DXM8.28 R84.1
N$199: DXM8.29 R82.1
N$200: DXM8.17 R87.1 R88.2
N$201: R85.2 T15.1
N$202: DXM8.32 K8.6
N$203: DXM8.31 K8.3
N$204: SG8.2 T16.3
N$205: R86.2 T16.1
N$206: DXM8.12 R85.1
N$207: DXM8.13 R86.1
N$208: D40.A K8.8 R87.2 T15.3
NOT_RESET: BTM182.P$21 DXM1.30 PROGRAM.1
NOT_RESET1: BTM1.P$21 DXM2.30 PROGRAM1.1
NOT_RESET2: BTM2.P$21 DXM3.30 PROGRAM2.1
NOT_RESET3: BTM3.P$21 DXM4.30 PROGRAM3.1
NOT_RESET4: BTM4.P$21 DXM5.30 PROGRAM4.1
NOT_RESET5: BTM5.P$21 DXM6.30 PROGRAM5.1
NOT_RESET6: BTM6.P$21 DXM7.30 PROGRAM6.1
NOT_RESET7: BTM7.P$21 DXM8.30 PROGRAM7.1
PWM+: DXM1.2 JP3-OBD2.3
PWM+1: DXM2.2 JP3-OBD1.3
PWM+2: DXM3.2 JP3-OBD3.3
PWM+3: DXM4.2 JP3-OBD4.3
PWM+4: DXM5.2 JP3-OBD5.3
PWM+5: DXM6.2 JP3-OBD6.3
PWM+6: DXM7.2 JP3-OBD7.3
PWM+7: DXM8.2 JP3-OBD8.3
PWM-: DXM1.3 JP3-OBD2.4
PWM-1: DXM2.3 JP3-OBD1.4
PWM-2: DXM3.3 JP3-OBD3.4
PWM-3: DXM4.3 JP3-OBD4.4
PWM-4: DXM5.3 JP3-OBD5.4
PWM-5: DXM6.3 JP3-OBD6.4
PWM-6: DXM7.3 JP3-OBD7.4
PWM-7: DXM8.3 JP3-OBD8.4
RTS: DXM1.27 PROGRAM.7
RTS1: DXM2.27 PROGRAM1.7
RTS2: DXM3.27 PROGRAM2.7
RTS3: DXM4.27 PROGRAM3.7
RTS4: DXM5.27 PROGRAM4.7
RTS5: DXM6.27 PROGRAM5.7
RTS6: DXM7.27 PROGRAM6.7
RTS7: DXM8.27 PROGRAM7.7
SCK: DXM1.20 PROGRAM.4
SCK1: DXM2.20 PROGRAM1.4
SCK2: DXM3.20 PROGRAM2.4
SCK3: DXM4.20 PROGRAM3.4
SCK4: DXM5.20 PROGRAM4.4
SCK5: DXM6.20 PROGRAM5.4
SCK6: DXM7.20 PROGRAM6.4
SCK7: DXM8.20 PROGRAM7.4

## Tracks (layer width: path | path; a pad name or v marks a point on that pad's centre or on a via)
+3V1  (via drill 0.61)
  Top 0.254: 7.95,14.91 7.97,18.54 8.87,19.51 8.87,23.57 v10.14,24.84 | 7.95,14.91 8.4,14.46 6.08,12.14 4.05,12.14 DXM2.14 | v11.92,37.54 11.92,41.61 14.21,43.89 14.71,43.89 v22.84,35.77 | v34.27,34.75 35.29,34.75 35.29,25.35 37.83,22.81 JP1.1 | 7.95,14.91 11.16,14.94 12.36,13.73 12.89,13.76 20.81,5.76 v20.81,4.52
  Bottom 0.254: 9.89,24.59 9.63,24.84 8.62,24.84 7.6,25.86 R15.2 | 9.89,24.59 10.14,24.34 10.14,23.07 9.13,22.05 9.13,21.54 C6.1 | v10.14,24.84 9.89,24.59 | 26.14,26.62 24.87,25.35 24.87,19 24.37,18.49 24.37,14.94 24.11,14.68 24.11,8.08 22.84,6.81 22.59,6.81 21.83,6.05 C10.+ 21.57,5.79 20.81,5.03 v20.81,4.52 | 26.14,26.62 27.41,26.62 27.67,26.37 BTM1.P$14 27.92,26.37 34.27,34.62 v34.27,34.75 | v11.92,37.54 7.6,37.54 6.59,36.53 6.59,36.02 9.13,33.48 L2.1 | v22.84,35.77 22.84,33.48 26.14,30.18 26.14,26.62
+3V2  (via drill 0.61)
  Top 0.254: 112.35,85.45 112.33,81.81 111.43,80.84 111.43,76.78 v110.16,75.51 | 112.35,85.45 111.9,85.89 114.22,88.21 116.25,88.21 DXM3.14 | v108.38,62.81 108.38,58.75 106.09,56.46 105.59,56.46 v97.46,64.59 | v86.03,65.6 85.01,65.6 85.01,75 82.47,77.54 JP3.1 | 112.35,85.45 109.14,85.42 107.94,86.62 107.41,86.59 99.49,94.6 v99.49,95.83
  Bottom 0.254: 110.41,75.77 110.67,75.51 111.68,75.51 112.7,74.5 R26.2 | 110.41,75.77 110.16,76.02 110.16,77.29 111.17,78.31 111.17,78.81 C11.1 | v110.16,75.51 110.41,75.77 | 94.16,73.73 95.43,75 95.43,81.35 95.93,81.86 95.93,85.42 96.19,85.67 96.19,92.28 97.46,93.55 97.71,93.55 98.47,94.31 C15.+ 98.73,94.56 99.49,95.32 v99.49,95.83 | 94.16,73.73 92.89,73.73 92.63,73.99 BTM2.P$14 92.38,73.99 86.03,65.73 v86.03,65.6 | v108.38,62.81 112.7,62.81 113.71,63.83 113.71,64.34 111.17,66.88 L3.1 | v97.46,64.59 97.46,66.88 94.16,70.18 94.16,73.73
+3V3  (via drill 0.61)
  Top 0.254: 151.72,85.45 151.7,81.81 150.8,80.84 150.8,76.78 v149.53,75.51 | 151.72,85.45 151.27,85.89 153.59,88.21 155.62,88.21 DXM1.14 | v147.75,62.81 147.75,58.75 145.46,56.46 144.96,56.46 v136.83,64.59 | v125.4,65.6 124.38,65.6 124.38,75 121.84,77.54 JP2.1 | 151.72,85.45 148.51,85.42 147.31,86.62 146.78,86.59 138.86,94.6 v138.86,95.83
  Bottom 0.254: 149.78,75.77 150.04,75.51 151.05,75.51 152.07,74.5 R4.2 | 149.78,75.77 149.53,76.02 149.53,77.29 150.54,78.31 150.54,78.81 C1.1 | v149.53,75.51 149.78,75.77 | 133.53,73.73 134.8,75 134.8,81.35 135.3,81.86 135.3,85.42 135.56,85.67 135.56,92.28 136.83,93.55 137.08,93.55 137.84,94.31 C2.+ 138.1,94.56 138.86,95.32 v138.86,95.83 | 133.53,73.73 132.26,73.73 132,73.99 BTM182.P$14 131.75,73.99 125.4,65.73 v125.4,65.6 | v147.75,62.81 152.07,62.81 153.08,63.83 153.08,64.34 150.54,66.88 L1.1 | v136.83,64.59 136.83,66.88 133.53,70.18 133.53,73.73
+3V4  (via drill 0.61)
  Top 0.254: 72.98,85.45 72.96,81.81 72.06,80.84 72.06,76.78 v70.79,75.51 | 72.98,85.45 72.53,85.89 74.85,88.21 76.88,88.21 DXM4.14 | v69.01,62.81 69.01,58.75 66.72,56.46 66.22,56.46 v58.09,64.59 | v46.66,65.6 45.64,65.6 45.64,75 43.1,77.54 JP4.1 | 72.98,85.45 69.77,85.42 68.57,86.62 68.04,86.59 60.12,94.6 v60.12,95.83
  Bottom 0.254: 71.04,75.77 71.3,75.51 72.31,75.51 73.33,74.5 R37.2 | 71.04,75.77 70.79,76.02 70.79,77.29 71.8,78.31 71.8,78.81 C16.1 | v70.79,75.51 71.04,75.77 | 54.79,73.73 56.06,75 56.06,81.35 56.56,81.86 56.56,85.42 56.82,85.67 56.82,92.28 58.09,93.55 58.34,93.55 59.1,94.31 C20.+ 59.36,94.56 60.12,95.32 v60.12,95.83 | 54.79,73.73 53.52,73.73 53.26,73.99 BTM3.P$14 53.01,73.99 46.66,65.73 v46.66,65.6 | v69.01,62.81 73.33,62.81 74.34,63.83 74.34,64.34 71.8,66.88 L4.1 | v58.09,64.59 58.09,66.88 54.79,70.18 54.79,73.73
+3V5  (via drill 0.61)
  Top 0.254: 33.61,85.45 33.59,81.81 32.69,80.84 32.69,76.78 v31.42,75.51 | 33.61,85.45 33.16,85.89 35.48,88.21 37.51,88.21 DXM5.14 | v29.64,62.81 29.64,58.75 27.35,56.46 26.85,56.46 v18.72,64.59 | v7.29,65.6 6.27,65.6 6.27,75 3.73,77.54 JP5.1 | 33.61,85.45 30.4,85.42 29.2,86.62 28.67,86.59 20.75,94.6 v20.75,95.83
  Bottom 0.254: 31.67,75.77 31.93,75.51 32.94,75.51 33.96,74.5 R48.2 | 31.67,75.77 31.42,76.02 31.42,77.29 32.43,78.31 32.43,78.81 C21.1 | v31.42,75.51 31.67,75.77 | 15.42,73.73 16.69,75 16.69,81.35 17.19,81.86 17.19,85.42 17.45,85.67 17.45,92.28 18.72,93.55 18.97,93.55 19.73,94.31 C25.+ 19.99,94.56 20.75,95.32 v20.75,95.83 | 15.42,73.73 14.15,73.73 13.89,73.99 BTM4.P$14 13.64,73.99 7.29,65.73 v7.29,65.6 | v29.64,62.81 33.96,62.81 34.97,63.83 34.97,64.34 32.43,66.88 L5.1 | v18.72,64.59 18.72,66.88 15.42,70.18 15.42,73.73
+3V6  (via drill 0.61)
  Top 0.254: 47.32,14.88 47.34,18.51 48.24,19.48 48.24,23.54 v49.51,24.81 | 47.32,14.88 47.77,14.43 45.45,12.11 43.42,12.11 DXM6.14 | v51.29,37.51 51.29,41.58 53.58,43.86 54.08,43.86 v62.21,35.74 | v73.64,34.72 74.66,34.72 74.66,25.32 77.2,22.78 JP6.1 | 47.32,14.88 50.53,14.91 51.73,13.7 52.26,13.73 60.18,5.73 v60.18,4.49
  Bottom 0.254: 49.26,24.56 49,24.81 47.99,24.81 46.97,25.83 R59.2 | 49.26,24.56 49.51,24.31 49.51,23.04 48.5,22.02 48.5,21.51 C26.1 | v49.51,24.81 49.26,24.56 | 65.51,26.59 64.24,25.32 64.24,18.97 63.74,18.46 63.74,14.91 63.48,14.65 63.48,8.05 62.21,6.78 61.96,6.78 61.2,6.02 C30.+ 60.94,5.76 60.18,5 v60.18,4.49 | 65.51,26.59 66.78,26.59 67.04,26.34 BTM5.P$14 67.29,26.34 73.64,34.59 v73.64,34.72 | v51.29,37.51 46.97,37.51 45.96,36.5 45.96,35.99 48.5,33.45 L6.1 | v62.21,35.74 62.21,33.45 65.51,30.15 65.51,26.59
+3V7  (via drill 0.61)
  Top 0.254: 86.69,14.88 86.71,18.51 87.61,19.48 87.61,23.54 v88.88,24.81 | 86.69,14.88 87.14,14.43 84.82,12.11 82.79,12.11 DXM7.14 | v90.66,37.51 90.66,41.58 92.95,43.86 93.45,43.86 v101.58,35.74 | v113.01,34.72 114.03,34.72 114.03,25.32 116.57,22.78 JP7.1 | 86.69,14.88 89.9,14.91 91.1,13.7 91.63,13.73 99.55,5.73 v99.55,4.49
  Bottom 0.254: 88.63,24.56 88.37,24.81 87.36,24.81 86.34,25.83 R70.2 | 88.63,24.56 88.88,24.31 88.88,23.04 87.87,22.02 87.87,21.51 C31.1 | v88.88,24.81 88.63,24.56 | 104.88,26.59 103.61,25.32 103.61,18.97 103.11,18.46 103.11,14.91 102.85,14.65 102.85,8.05 101.58,6.78 101.33,6.78 100.57,6.02 C35.+ 100.31,5.76 99.55,5 v99.55,4.49 | 104.88,26.59 106.15,26.59 106.41,26.34 BTM6.P$14 106.66,26.34 113.01,34.59 v113.01,34.72 | v90.66,37.51 86.34,37.51 85.33,36.5 85.33,35.99 87.87,33.45 L7.1 | v101.58,35.74 101.58,33.45 104.88,30.15 104.88,26.59
+3V8  (via drill 0.61)
  Top 0.254: 126.06,14.88 126.08,18.51 126.98,19.48 126.98,23.54 v128.25,24.81 | 126.06,14.88 126.51,14.43 124.19,12.11 122.16,12.11 DXM8.14 | v130.03,37.51 130.03,41.58 132.32,43.86 132.82,43.86 v140.95,35.74 | v152.38,34.72 153.4,34.72 153.4,25.32 155.94,22.78 JP8.1 | 126.06,14.88 129.27,14.91 130.47,13.7 131,13.73 138.92,5.73 v138.92,4.49
  Bottom 0.254: 128,24.56 127.74,24.81 126.73,24.81 125.71,25.83 R81.2 | 128,24.56 128.25,24.31 128.25,23.04 127.24,22.02 127.24,21.51 C36.1 | v128.25,24.81 128,24.56 | 144.25,26.59 142.98,25.32 142.98,18.97 142.48,18.46 142.48,14.91 142.22,14.65 142.22,8.05 140.95,6.78 140.7,6.78 139.94,6.02 C40.+ 139.68,5.76 138.92,5 v138.92,4.49 | 144.25,26.59 145.52,26.59 145.78,26.34 BTM7.P$14 146.03,26.34 152.38,34.59 v152.38,34.72 | v130.03,37.51 125.71,37.51 124.7,36.5 124.7,35.99 127.24,33.45 L8.1 | v140.95,35.74 140.95,33.45 144.25,30.15 144.25,26.59
+12V  (via drill 0.61)
  Top 0.254: v141.65,82.37 141.65,84.15 v142.92,85.42 | JP2-OBD2.4 142.67,94.05 v146.23,90.5 | v125.4,67.13 126.41,66.49 126.41,64.59 122.6,64.59 122.6,66.88 SG1.1 | v133.27,74.75 134.03,73.99 139.88,73.99 v141.15,75.26
  Bottom 0.254: D5.C 122.86,68.65 122.86,67.13 122.6,66.88 SG1.1 | v141.65,82.37 141.65,77.29 K1.1 141.4,77.03 141.15,76.78 v141.15,75.26 | v142.92,85.42 145.97,88.47 D2.A 146.23,88.72 v146.23,90.5 | v125.4,67.13 125.4,72.08 130.73,77.54 131.75,77.54 132.76,76.53 132.76,75.26 v133.27,74.75
+12V1  (via drill 0.61)
  Top 0.254: v18.02,17.99 18.02,16.21 v16.75,14.94 | JP2-OBD1.4 17,6.3 v13.44,9.86 | v34.27,33.23 33.26,33.86 33.26,35.77 37.07,35.77 37.07,33.48 SG2.1 | v26.4,25.61 25.64,26.37 19.79,26.37 v18.52,25.1
  Bottom 0.254: D10.C 36.81,31.7 36.81,33.23 37.07,33.48 SG2.1 | v18.02,17.99 18.02,23.07 K2.1 18.27,23.32 18.52,23.57 v18.52,25.1 | v16.75,14.94 13.7,11.89 D7.A 13.44,11.64 v13.44,9.86 | v34.27,33.23 34.27,28.27 28.94,22.81 27.92,22.81 26.91,23.83 26.91,25.1 v26.4,25.61
+12V2  (via drill 0.61)
  Top 0.254: v102.28,82.37 102.28,84.15 v103.55,85.42 | JP2-OBD3.4 103.3,94.05 v106.86,90.5 | v86.03,67.13 87.04,66.49 87.04,64.59 83.23,64.59 83.23,66.88 SG3.1 | v93.9,74.75 94.66,73.99 100.51,73.99 v101.78,75.26
  Bottom 0.254: D15.C 83.49,68.65 83.49,67.13 83.23,66.88 SG3.1 | v102.28,82.37 102.28,77.29 K3.1 102.03,77.03 101.78,76.78 v101.78,75.26 | v103.55,85.42 106.6,88.47 D12.A 106.86,88.72 v106.86,90.5 | v86.03,67.13 86.03,72.08 91.36,77.54 92.38,77.54 93.39,76.53 93.39,75.26 v93.9,74.75
+12V3  (via drill 0.61)
  Top 0.254: v62.91,82.37 62.91,84.15 v64.18,85.42 | JP2-OBD4.4 63.93,94.05 v67.49,90.5 | v46.66,67.13 47.67,66.49 47.67,64.59 43.86,64.59 43.86,66.88 SG4.1 | v54.53,74.75 55.29,73.99 61.14,73.99 v62.41,75.26
  Bottom 0.254: D20.C 44.12,68.65 44.12,67.13 43.86,66.88 SG4.1 | v62.91,82.37 62.91,77.29 K4.1 62.66,77.03 62.41,76.78 v62.41,75.26 | v64.18,85.42 67.23,88.47 D17.A 67.49,88.72 v67.49,90.5 | v46.66,67.13 46.66,72.08 51.99,77.54 53.01,77.54 54.02,76.53 54.02,75.26 v54.53,74.75
+12V4  (via drill 0.61)
  Top 0.254: v23.54,82.37 23.54,84.15 v24.81,85.42 | JP2-OBD5.4 24.56,94.05 v28.12,90.5 | v7.29,67.13 8.3,66.49 8.3,64.59 4.49,64.59 4.49,66.88 SG5.1 | v15.16,74.75 15.92,73.99 21.77,73.99 v23.04,75.26
  Bottom 0.254: D25.C 4.75,68.65 4.75,67.13 4.49,66.88 SG5.1 | v23.54,82.37 23.54,77.29 K5.1 23.29,77.03 23.04,76.78 v23.04,75.26 | v24.81,85.42 27.86,88.47 D22.A 28.12,88.72 v28.12,90.5 | v7.29,67.13 7.29,72.08 12.62,77.54 13.64,77.54 14.65,76.53 14.65,75.26 v15.16,74.75
+12V5  (via drill 0.61)
  Top 0.254: v57.39,17.96 57.39,16.18 v56.12,14.91 | JP2-OBD6.4 56.37,6.27 v52.81,9.83 | v73.64,33.2 72.63,33.83 72.63,35.74 76.44,35.74 76.44,33.45 SG6.1 | v65.77,25.58 65.01,26.34 59.16,26.34 v57.89,25.07
  Bottom 0.254: D30.C 76.18,31.67 76.18,33.2 76.44,33.45 SG6.1 | v57.39,17.96 57.39,23.04 K6.1 57.64,23.29 57.89,23.54 v57.89,25.07 | v56.12,14.91 53.07,11.86 D27.A 52.81,11.61 v52.81,9.83 | v73.64,33.2 73.64,28.24 68.31,22.78 67.29,22.78 66.28,23.8 66.28,25.07 v65.77,25.58
+12V6  (via drill 0.61)
  Top 0.254: v96.76,17.96 96.76,16.18 v95.49,14.91 | JP2-OBD7.4 95.74,6.27 v92.18,9.83 | v113.01,33.2 112,33.83 112,35.74 115.81,35.74 115.81,33.45 SG7.1 | v105.14,25.58 104.38,26.34 98.53,26.34 v97.26,25.07
  Bottom 0.254: D35.C 115.55,31.67 115.55,33.2 115.81,33.45 SG7.1 | v96.76,17.96 96.76,23.04 K7.1 97.01,23.29 97.26,23.54 v97.26,25.07 | v95.49,14.91 92.44,11.86 D32.A 92.18,11.61 v92.18,9.83 | v113.01,33.2 113.01,28.24 107.68,22.78 106.66,22.78 105.65,23.8 105.65,25.07 v105.14,25.58
+12V7  (via drill 0.61)
  Top 0.254: v136.13,17.96 136.13,16.18 v134.86,14.91 | JP2-OBD8.4 135.11,6.27 v131.55,9.83 | v152.38,33.2 151.37,33.83 151.37,35.74 155.18,35.74 155.18,33.45 SG8.1 | v144.51,25.58 143.75,26.34 137.9,26.34 v136.63,25.07
  Bottom 0.254: D40.C 154.92,31.67 154.92,33.2 155.18,33.45 SG8.1 | v136.13,17.96 136.13,23.04 K8.1 136.38,23.29 136.63,23.54 v136.63,25.07 | v134.86,14.91 131.81,11.86 D37.A 131.55,11.61 v131.55,9.83 | v152.38,33.2 152.38,28.24 147.05,22.78 146.03,22.78 145.02,23.8 145.02,25.07 v144.51,25.58
A0
  Top 0.254: DXM1.18 130.48,94.05 129.72,94.81 128.19,94.81 PROGRAM.3
A1
  Top 0.254: DXM2.18 29.19,6.3 29.95,5.54 31.48,5.54 PROGRAM1.3
A2
  Top 0.254: DXM3.18 91.11,94.05 90.35,94.81 88.82,94.81 PROGRAM2.3
A3
  Top 0.254: DXM4.18 51.74,94.05 50.98,94.81 49.45,94.81 PROGRAM3.3
A4
  Top 0.254: DXM5.18 12.37,94.05 11.61,94.81 10.08,94.81 PROGRAM4.3
A5
  Top 0.254: DXM6.18 68.56,6.27 69.32,5.51 70.85,5.51 PROGRAM5.3
A6
  Top 0.254: DXM7.18 107.93,6.27 108.69,5.51 110.22,5.51 PROGRAM6.3
A7
  Top 0.254: DXM8.18 147.3,6.27 148.06,5.51 149.59,5.51 PROGRAM7.3
CS
  Top 0.254: DXM1.19 130.48,92.02 PROGRAM.2
CS1
  Top 0.254: DXM2.19 29.19,8.33 PROGRAM1.2
CS2
  Top 0.254: DXM3.19 91.11,92.02 PROGRAM2.2
CS3
  Top 0.254: DXM4.19 51.74,92.02 PROGRAM3.2
CS4
  Top 0.254: DXM5.19 12.37,92.02 PROGRAM4.2
CS5
  Top 0.254: DXM6.19 68.56,8.3 PROGRAM5.2
CS6
  Top 0.254: DXM7.19 107.93,8.3 PROGRAM6.2
CS7
  Top 0.254: DXM8.19 147.3,8.3 PROGRAM7.2
CTS  (via drill 0.61)
  Top 0.254: v133.02,78.81 DXM1.26
  Bottom 0.254: v133.02,78.81 133.02,83.13 131.49,84.66 131.49,90.5 129.72,92.28 125.65,92.28 PROGRAM.5
CTS1  (via drill 0.61)
  Top 0.254: v26.65,21.54 DXM2.26
  Bottom 0.254: v26.65,21.54 26.65,17.22 28.18,15.7 28.18,9.86 29.95,8.08 34.02,8.08 PROGRAM1.5
CTS2  (via drill 0.61)
  Top 0.254: v93.65,78.81 DXM3.26
  Bottom 0.254: v93.65,78.81 93.65,83.13 92.12,84.66 92.12,90.5 90.35,92.28 86.28,92.28 PROGRAM2.5
CTS3  (via drill 0.61)
  Top 0.254: v54.28,78.81 DXM4.26
  Bottom 0.254: v54.28,78.81 54.28,83.13 52.75,84.66 52.75,90.5 50.98,92.28 46.91,92.28 PROGRAM3.5
CTS4  (via drill 0.61)
  Top 0.254: v14.91,78.81 DXM5.26
  Bottom 0.254: v14.91,78.81 14.91,83.13 13.38,84.66 13.38,90.5 11.61,92.28 7.54,92.28 PROGRAM4.5
CTS5  (via drill 0.61)
  Top 0.254: v66.02,21.51 DXM6.26
  Bottom 0.254: v66.02,21.51 66.02,17.19 67.55,15.67 67.55,9.83 69.32,8.05 73.39,8.05 PROGRAM5.5
CTS6  (via drill 0.61)
  Top 0.254: v105.39,21.51 DXM7.26
  Bottom 0.254: v105.39,21.51 105.39,17.19 106.92,15.67 106.92,9.83 108.69,8.05 112.76,8.05 PROGRAM6.5
CTS7  (via drill 0.61)
  Top 0.254: v144.76,21.51 DXM8.26
  Bottom 0.254: v144.76,21.51 144.76,17.19 146.29,15.67 146.29,9.83 148.06,8.05 152.13,8.05 PROGRAM7.5
GND  (via drill 0.6, 0.61)
  Top 0.254: 126.16,69.16 125.4,69.92 125.4,79.83 124.38,80.84 JP2.3 | D3.K 128.95,55.7 127.43,57.22 127.43,60.78 127.94,61.29 127.94,67.38 126.16,69.16 | DXM1.4 155.62,69.41 155.12,69.92 v153.77,69.93 153.6,70.29 v153.59,78.81 | v142.16,72.21 v143.43,73.48 | JP2-OBD2.3 140.13,93.97 146.43,87.7 v149.27,87.7 | v150.04,52.4 148,52.4 v146.48,53.92 | 126.16,69.16 v126.92,70.05
  Bottom 0.254: T2.2 128.19,86.43 126.92,86.43 D1.1 126.67,86.43 126.67,84.91 125.65,83.89 125.65,82.88 124.13,81.35 | 124.13,81.35 124.38,81.1 JP2.3 124.13,81.35 | 124.13,81.35 123.11,82.37 123.11,83.89 121.59,85.42 121.59,86.18 T1.2 | 140.13,92.02 138.1,89.99 138.1,88.47 C5.2 | 140.13,92.02 140.64,92.02 C3.- | C2.- 140.64,94.31 140.64,92.28 C3.- | JP2-OBD2.3 140.13,92.02 | 140.13,92.02 C3.- | 150.8,86.18 150.8,86.94 R11.1 | 150.8,86.18 152.07,84.91 R6.2 152.32,84.66 152.32,84.15 153.42,83.13 153.42,80.08 152.83,79.58 | 152.83,79.58 152.32,79.07 C1.2 | 152.32,70.94 152.32,69.92 C4.2 152.58,69.92 v153.77,69.93 | 152.32,70.94 152.32,71.95 R3.2 | v143.43,73.48 142.92,73.99 142.92,76.02 143.94,77.03 143.94,77.54 IC1.4 | v142.16,72.21 142.16,58.49 144.7,55.95 145.72,55.95 146.48,56.72 | 146.48,56.72 146.73,56.97 146.73,68.4 149.27,70.94 152.32,70.94 | v153.59,78.81 152.83,79.58 | 150.8,86.18 v149.27,87.7 | v150.04,52.4 133.27,52.4 130.22,55.45 129.21,55.45 D3.K | v146.48,53.92 146.48,56.72 | v126.92,70.05 127.18,71.7 130.73,75.26 BTM182.P$15
GND1  (via drill 0.6, 0.61)
  Top 0.254: 33.51,31.19 34.27,30.43 34.27,20.53 35.29,19.51 JP1.3 | D8.K 30.72,44.66 32.24,43.13 32.24,39.58 31.73,39.07 31.73,32.97 33.51,31.19 | DXM2.4 4.05,30.94 4.55,30.43 v5.9,30.42 6.07,30.06 v6.08,21.54 | v17.51,28.15 v16.24,26.88 | JP2-OBD1.3 19.54,6.38 13.24,12.65 v10.4,12.65 | v9.63,47.96 11.67,47.96 v13.19,46.43 | 33.51,31.19 v32.75,30.3
  Bottom 0.254: T4.2 31.48,13.92 32.75,13.92 D6.1 33,13.92 33,15.45 34.02,16.46 34.02,17.48 35.54,19 | 35.54,19 35.29,19.26 JP1.3 35.54,19 | 35.54,19 36.56,17.99 36.56,16.46 38.08,14.94 38.08,14.18 T3.2 | 19.54,8.33 21.57,10.37 21.57,11.89 C8.2 | 19.54,8.33 19.03,8.33 C9.- | C10.- 19.03,6.05 19.03,8.08 C9.- | JP2-OBD1.3 19.54,8.33 | 19.54,8.33 C9.- | 8.87,14.18 8.87,13.41 R22.1 | 8.87,14.18 7.6,15.45 R17.2 7.35,15.7 7.35,16.21 6.25,17.22 6.25,20.27 6.84,20.78 | 6.84,20.78 7.35,21.29 C6.2 | 7.35,29.42 7.35,30.43 C7.2 7.09,30.43 v5.9,30.42 | 7.35,29.42 7.35,28.4 R14.2 | v16.24,26.88 16.75,26.37 16.75,24.34 15.73,23.32 15.73,22.81 IC2.4 | v17.51,28.15 17.51,41.86 14.97,44.4 13.95,44.4 13.19,43.64 | 13.19,43.64 12.94,43.39 12.94,31.96 10.4,29.42 7.35,29.42 | v6.08,21.54 6.84,20.78 | 8.87,14.18 v10.4,12.65 | v9.63,47.96 26.4,47.96 29.45,44.91 30.46,44.91 D8.K | v13.19,46.43 13.19,43.64 | v32.75,30.3 32.49,28.65 28.94,25.1 BTM1.P$15
GND2  (via drill 0.6, 0.61)
  Top 0.254: 86.79,69.16 86.03,69.92 86.03,79.83 85.01,80.84 JP3.3 | D13.K 89.58,55.7 88.06,57.22 88.06,60.78 88.57,61.29 88.57,67.38 86.79,69.16 | DXM3.4 116.25,69.41 115.75,69.92 v114.4,69.93 114.23,70.29 v114.22,78.81 | v102.79,72.21 v104.06,73.48 | JP2-OBD3.3 100.76,93.97 107.06,87.7 v109.9,87.7 | v110.67,52.4 108.63,52.4 v107.11,53.92 | 86.79,69.16 v87.55,70.05
  Bottom 0.254: T6.2 88.82,86.43 87.55,86.43 D11.1 87.3,86.43 87.3,84.91 86.28,83.89 86.28,82.88 84.76,81.35 | 84.76,81.35 85.01,81.1 JP3.3 84.76,81.35 | 84.76,81.35 83.74,82.37 83.74,83.89 82.22,85.42 82.22,86.18 T5.2 | 100.76,92.02 98.73,89.99 98.73,88.47 C13.2 | 100.76,92.02 101.27,92.02 C14.- | C15.- 101.27,94.31 101.27,92.28 C14.- | JP2-OBD3.3 100.76,92.02 | 100.76,92.02 C14.- | 111.43,86.18 111.43,86.94 R33.1 | 111.43,86.18 112.7,84.91 R28.2 112.95,84.66 112.95,84.15 114.05,83.13 114.05,80.08 113.46,79.58 | 113.46,79.58 112.95,79.07 C11.2 | 112.95,70.94 112.95,69.92 C12.2 113.21,69.92 v114.4,69.93 | 112.95,70.94 112.95,71.95 R25.2 | v104.06,73.48 103.55,73.99 103.55,76.02 104.57,77.03 104.57,77.54 IC3.4 | v102.79,72.21 102.79,58.49 105.33,55.95 106.35,55.95 107.11,56.72 | 107.11,56.72 107.36,56.97 107.36,68.4 109.9,70.94 112.95,70.94 | v114.22,78.81 113.46,79.58 | 111.43,86.18 v109.9,87.7 | v110.67,52.4 93.9,52.4 90.85,55.45 89.84,55.45 D13.K | v107.11,53.92 107.11,56.72 | v87.55,70.05 87.81,71.7 91.36,75.26 BTM2.P$15
GND3  (via drill 0.6, 0.61)
  Top 0.254: 47.42,69.16 46.66,69.92 46.66,79.83 45.64,80.84 JP4.3 | D18.K 50.21,55.7 48.69,57.22 48.69,60.78 49.2,61.29 49.2,67.38 47.42,69.16 | DXM4.4 76.88,69.41 76.38,69.92 v75.03,69.93 74.86,70.29 v74.85,78.81 | v63.42,72.21 v64.69,73.48 | JP2-OBD4.3 61.39,93.97 67.69,87.7 v70.53,87.7 | v71.3,52.4 69.26,52.4 v67.74,53.92 | 47.42,69.16 v48.18,70.05
  Bottom 0.254: T8.2 49.45,86.43 48.18,86.43 D16.1 47.93,86.43 47.93,84.91 46.91,83.89 46.91,82.88 45.39,81.35 | 45.39,81.35 45.64,81.1 JP4.3 45.39,81.35 | 45.39,81.35 44.37,82.37 44.37,83.89 42.85,85.42 42.85,86.18 T7.2 | 61.39,92.02 59.36,89.99 59.36,88.47 C18.2 | 61.39,92.02 61.9,92.02 C19.- | C20.- 61.9,94.31 61.9,92.28 C19.- | JP2-OBD4.3 61.39,92.02 | 61.39,92.02 C19.- | 72.06,86.18 72.06,86.94 R44.1 | 72.06,86.18 73.33,84.91 R39.2 73.58,84.66 73.58,84.15 74.68,83.13 74.68,80.08 74.09,79.58 | 74.09,79.58 73.58,79.07 C16.2 | 73.58,70.94 73.58,69.92 C17.2 73.84,69.92 v75.03,69.93 | 73.58,70.94 73.58,71.95 R36.2 | v64.69,73.48 64.18,73.99 64.18,76.02 65.2,77.03 65.2,77.54 IC4.4 | v63.42,72.21 63.42,58.49 65.96,55.95 66.98,55.95 67.74,56.72 | 67.74,56.72 67.99,56.97 67.99,68.4 70.53,70.94 73.58,70.94 | v74.85,78.81 74.09,79.58 | 72.06,86.18 v70.53,87.7 | v71.3,52.4 54.53,52.4 51.48,55.45 50.47,55.45 D18.K | v67.74,53.92 67.74,56.72 | v48.18,70.05 48.44,71.7 51.99,75.26 BTM3.P$15
GND4  (via drill 0.6, 0.61)
  Top 0.254: 8.05,69.16 7.29,69.92 7.29,79.83 6.27,80.84 JP5.3 | D23.K 10.84,55.7 9.32,57.22 9.32,60.78 9.83,61.29 9.83,67.38 8.05,69.16 | DXM5.4 37.51,69.41 37.01,69.92 v35.66,69.93 35.49,70.29 v35.48,78.81 | v24.05,72.21 v25.32,73.48 | JP2-OBD5.3 22.02,93.97 28.32,87.7 v31.16,87.7 | v31.93,52.4 29.89,52.4 v28.37,53.92 | 8.05,69.16 v8.81,70.05
  Bottom 0.254: T10.2 10.08,86.43 8.81,86.43 D21.1 8.56,86.43 8.56,84.91 7.54,83.89 7.54,82.88 6.02,81.35 | 6.02,81.35 6.27,81.1 JP5.3 6.02,81.35 | 6.02,81.35 5,82.37 5,83.89 3.48,85.42 3.48,86.18 T9.2 | 22.02,92.02 19.99,89.99 19.99,88.47 C23.2 | 22.02,92.02 22.53,92.02 C24.- | C25.- 22.53,94.31 22.53,92.28 C24.- | JP2-OBD5.3 22.02,92.02 | 22.02,92.02 C24.- | 32.69,86.18 32.69,86.94 R55.1 | 32.69,86.18 33.96,84.91 R50.2 34.21,84.66 34.21,84.15 35.31,83.13 35.31,80.08 34.72,79.58 | 34.72,79.58 34.21,79.07 C21.2 | 34.21,70.94 34.21,69.92 C22.2 34.47,69.92 v35.66,69.93 | 34.21,70.94 34.21,71.95 R47.2 | v25.32,73.48 24.81,73.99 24.81,76.02 25.83,77.03 25.83,77.54 IC5.4 | v24.05,72.21 24.05,58.49 26.59,55.95 27.61,55.95 28.37,56.72 | 28.37,56.72 28.62,56.97 28.62,68.4 31.16,70.94 34.21,70.94 | v35.48,78.81 34.72,79.58 | 32.69,86.18 v31.16,87.7 | v31.93,52.4 15.16,52.4 12.11,55.45 11.1,55.45 D23.K | v28.37,53.92 28.37,56.72 | v8.81,70.05 9.07,71.7 12.62,75.26 BTM4.P$15
GND5  (via drill 0.6, 0.61)
  Top 0.254: 72.88,31.16 73.64,30.4 73.64,20.5 74.66,19.48 JP6.3 | D28.K 70.09,44.63 71.61,43.1 71.61,39.55 71.1,39.04 71.1,32.94 72.88,31.16 | DXM6.4 43.42,30.91 43.92,30.4 v45.27,30.39 45.44,30.03 v45.45,21.51 | v56.88,28.12 v55.61,26.85 | JP2-OBD6.3 58.91,6.35 52.61,12.62 v49.77,12.62 | v49,47.93 51.04,47.93 v52.56,46.4 | 72.88,31.16 v72.12,30.27
  Bottom 0.254: T12.2 70.85,13.89 72.12,13.89 D26.1 72.37,13.89 72.37,15.42 73.39,16.43 73.39,17.45 74.91,18.97 | 74.91,18.97 74.66,19.23 JP6.3 74.91,18.97 | 74.91,18.97 75.93,17.96 75.93,16.43 77.45,14.91 77.45,14.15 T11.2 | 58.91,8.3 60.94,10.34 60.94,11.86 C28.2 | 58.91,8.3 58.4,8.3 C29.- | C30.- 58.4,6.02 58.4,8.05 C29.- | JP2-OBD6.3 58.91,8.3 | 58.91,8.3 C29.- | 48.24,14.15 48.24,13.38 R66.1 | 48.24,14.15 46.97,15.42 R61.2 46.72,15.67 46.72,16.18 45.62,17.19 45.62,20.24 46.21,20.75 | 46.21,20.75 46.72,21.26 C26.2 | 46.72,29.39 46.72,30.4 C27.2 46.46,30.4 v45.27,30.39 | 46.72,29.39 46.72,28.37 R58.2 | v55.61,26.85 56.12,26.34 56.12,24.31 55.1,23.29 55.1,22.78 IC6.4 | v56.88,28.12 56.88,41.83 54.34,44.37 53.32,44.37 52.56,43.61 | 52.56,43.61 52.31,43.36 52.31,31.93 49.77,29.39 46.72,29.39 | v45.45,21.51 46.21,20.75 | 48.24,14.15 v49.77,12.62 | v49,47.93 65.77,47.93 68.82,44.88 69.83,44.88 D28.K | v52.56,46.4 52.56,43.61 | v72.12,30.27 71.86,28.62 68.31,25.07 BTM5.P$15
GND6  (via drill 0.6, 0.61)
  Top 0.254: 112.25,31.16 113.01,30.4 113.01,20.5 114.03,19.48 JP7.3 | D33.K 109.46,44.63 110.98,43.1 110.98,39.55 110.47,39.04 110.47,32.94 112.25,31.16 | DXM7.4 82.79,30.91 83.29,30.4 v84.64,30.39 84.81,30.03 v84.82,21.51 | v96.25,28.12 v94.98,26.85 | JP2-OBD7.3 98.28,6.35 91.98,12.62 v89.14,12.62 | v88.37,47.93 90.41,47.93 v91.93,46.4 | 112.25,31.16 v111.49,30.27
  Bottom 0.254: T14.2 110.22,13.89 111.49,13.89 D31.1 111.74,13.89 111.74,15.42 112.76,16.43 112.76,17.45 114.28,18.97 | 114.28,18.97 114.03,19.23 JP7.3 114.28,18.97 | 114.28,18.97 115.3,17.96 115.3,16.43 116.82,14.91 116.82,14.15 T13.2 | 98.28,8.3 100.31,10.34 100.31,11.86 C33.2 | 98.28,8.3 97.77,8.3 C34.- | C35.- 97.77,6.02 97.77,8.05 C34.- | JP2-OBD7.3 98.28,8.3 | 98.28,8.3 C34.- | 87.61,14.15 87.61,13.38 R77.1 | 87.61,14.15 86.34,15.42 R72.2 86.09,15.67 86.09,16.18 84.99,17.19 84.99,20.24 85.58,20.75 | 85.58,20.75 86.09,21.26 C31.2 | 86.09,29.39 86.09,30.4 C32.2 85.83,30.4 v84.64,30.39 | 86.09,29.39 86.09,28.37 R69.2 | v94.98,26.85 95.49,26.34 95.49,24.31 94.47,23.29 94.47,22.78 IC7.4 | v96.25,28.12 96.25,41.83 93.71,44.37 92.69,44.37 91.93,43.61 | 91.93,43.61 91.68,43.36 91.68,31.93 89.14,29.39 86.09,29.39 | v84.82,21.51 85.58,20.75 | 87.61,14.15 v89.14,12.62 | v88.37,47.93 105.14,47.93 108.19,44.88 109.2,44.88 D33.K | v91.93,46.4 91.93,43.61 | v111.49,30.27 111.23,28.62 107.68,25.07 BTM6.P$15
GND7  (via drill 0.6, 0.61)
  Top 0.254: 151.62,31.16 152.38,30.4 152.38,20.5 153.4,19.48 JP8.3 | D38.K 148.83,44.63 150.35,43.1 150.35,39.55 149.84,39.04 149.84,32.94 151.62,31.16 | DXM8.4 122.16,30.91 122.66,30.4 v124.01,30.39 124.18,30.03 v124.19,21.51 | v135.62,28.12 v134.35,26.85 | JP2-OBD8.3 137.65,6.35 131.35,12.62 v128.51,12.62 | v127.74,47.93 129.78,47.93 v131.3,46.4 | 151.62,31.16 v150.86,30.27